# Altium PCB PCB_Gloves.pcbdoc
Units mil, origin at the board's own origin, x right, y up, seen from the top; angles counter-clockwise.
Board outline 3915 x 3980 mil, 2 copper layers (Top Layer, Bottom Layer); 46 components, 79 nets, 199 pads, 40 vias.
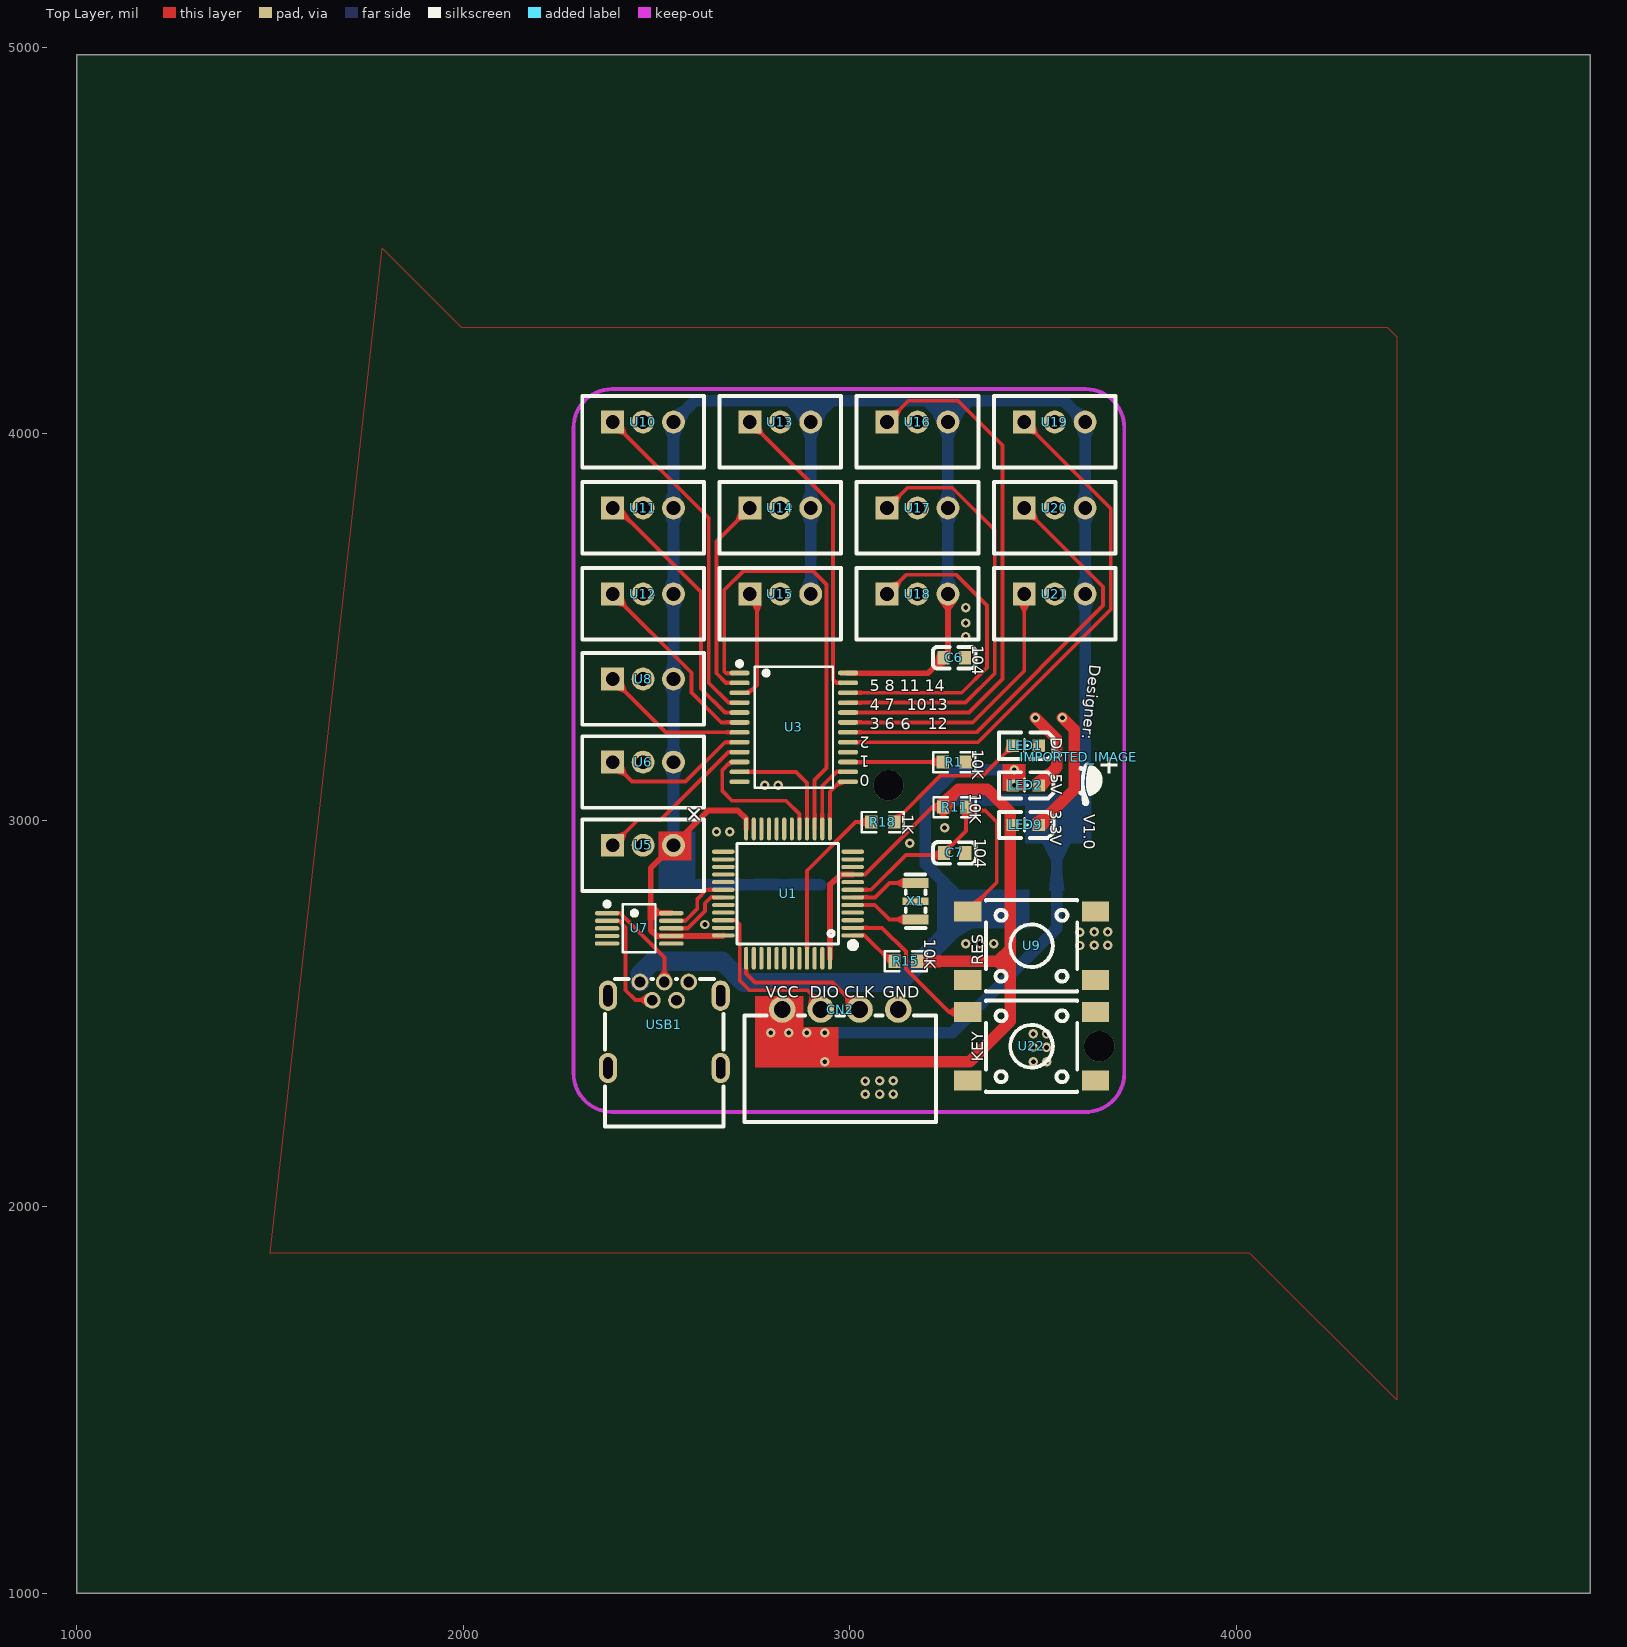
[diagram p0: Top Layer view]
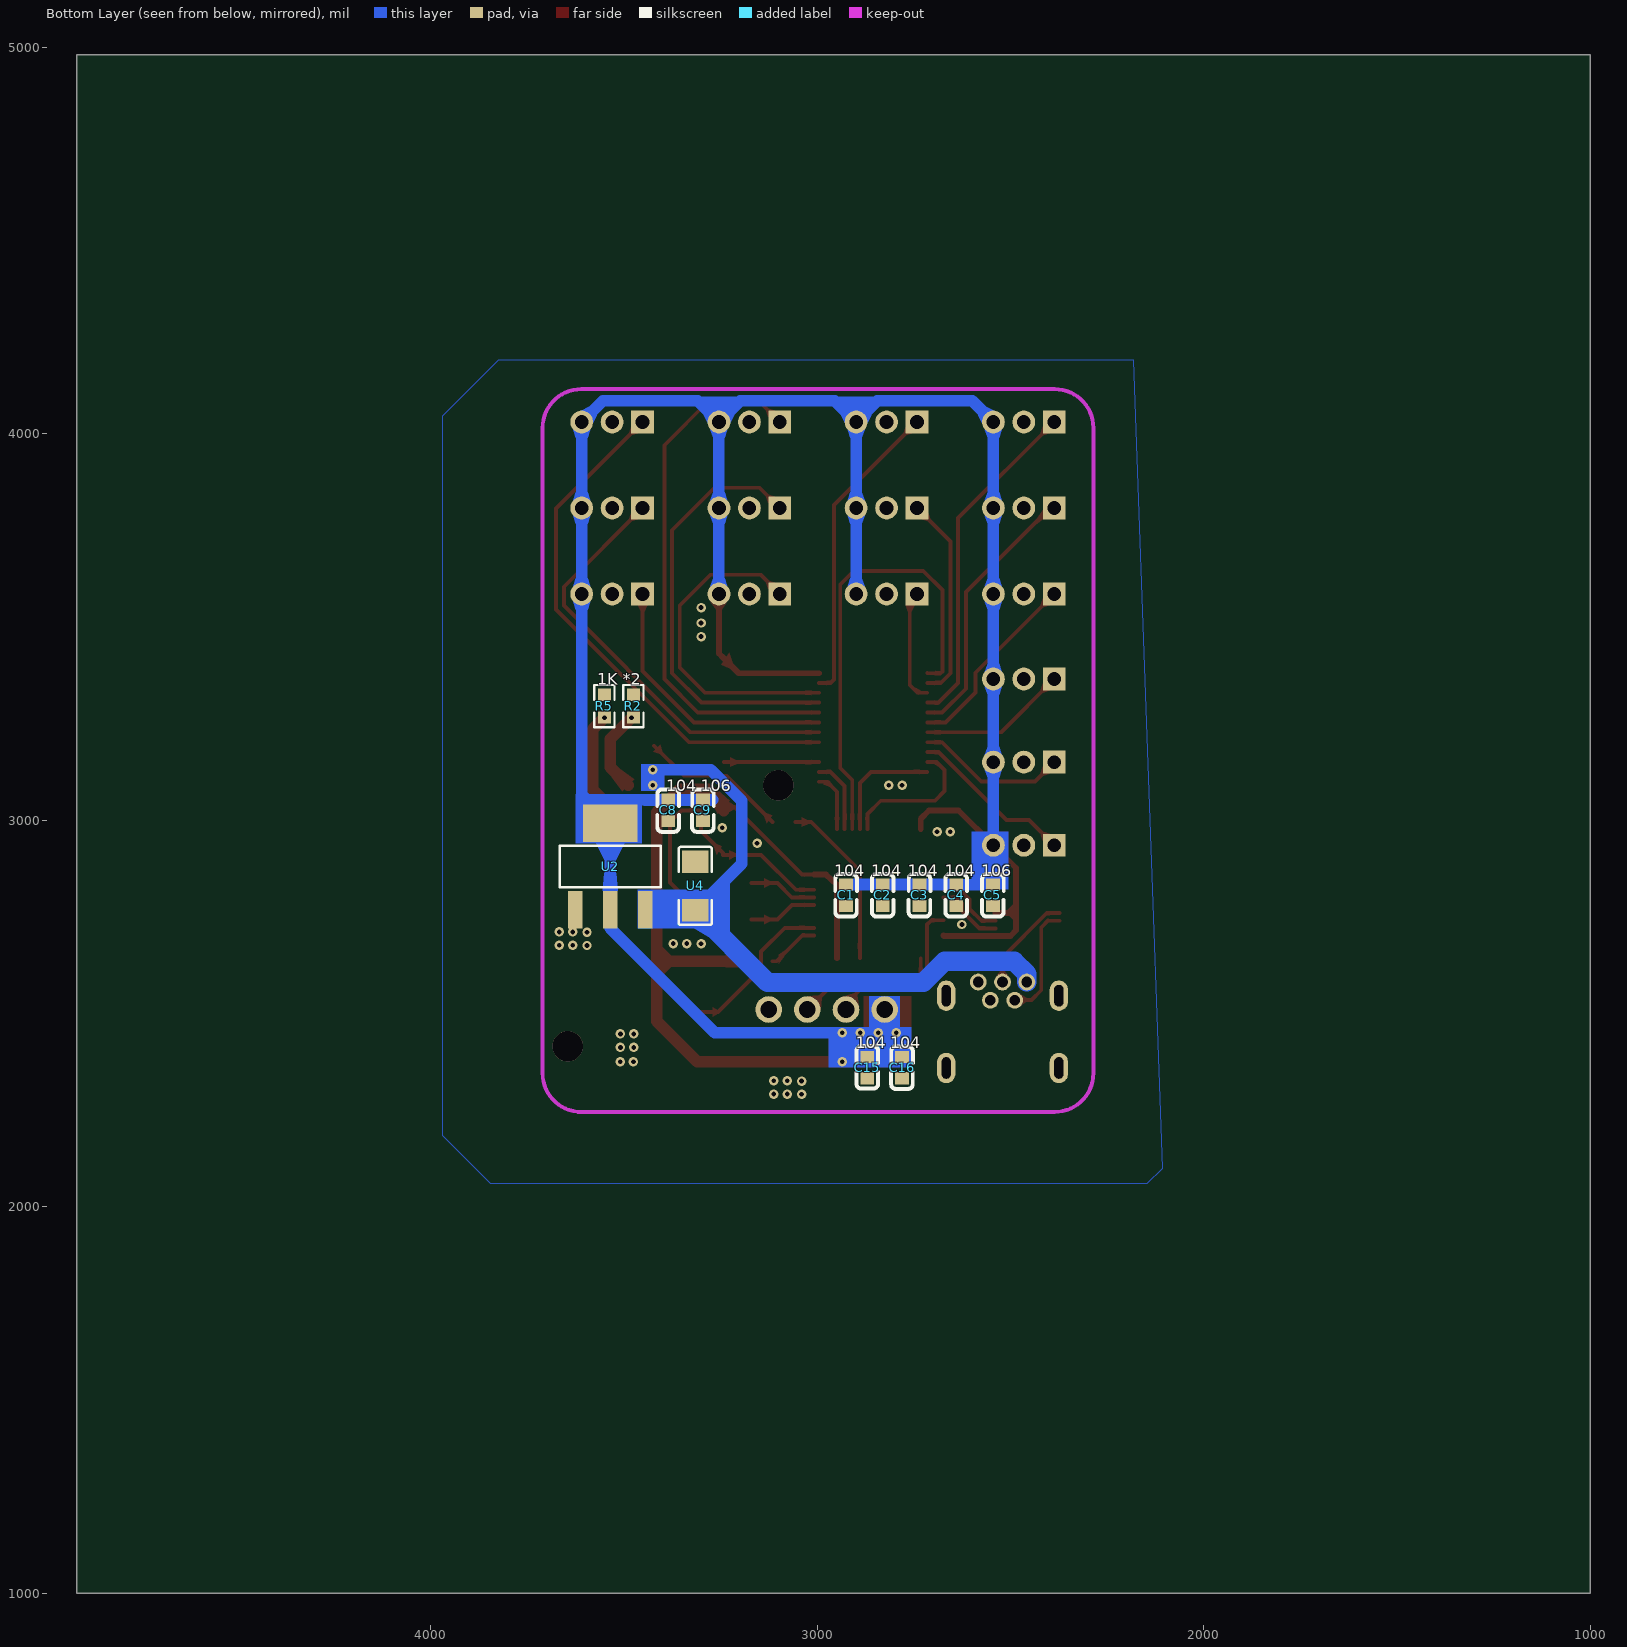
[diagram p1: Bottom Layer view, seen from below]

## Layer stack, top to bottom
Top Layer: signal copper (thickness not stored)
Dielectric: dielectric 12.6, FR-4, Dk 4.8
Bottom Layer: signal copper (thickness not stored)

## Board outline
4915,1000 1000,1000 1000,4980 4915,4980

## Components (designator, comment, footprint, x,y, rotation, side; value= is the part's Value field where it differs from the comment)
C1 "104" C0603#1 2924.79,2805.61 r270 bottom
C2 "104" C0603#1 2829.79,2805.61 r270 bottom
C3 "104" C0603#1 2734.79,2805.61 r270 bottom
C4 "104" C0603#1 2639.79,2805.61 r270 bottom
C5 "106" C0603#1 2544.79,2805.61 r270 bottom
C6 "104" C0603#2 3270,3420 r0 top
C7 "104" C0603#2 3270.81,2915 r0 top
C8 "104" C0603#1 3385,3025 r270 bottom
C9 "106" C0603#1 3295,3025 r270 bottom
C15 "104" C0603#1 2870,2360 r90 bottom
C16 "104" C0603#1 2780,2360 r270 bottom
CN2 "XH-4AW_C2908613" CONN-TH_XH-4AW 2975,2510 r0 top
IMPORTED_IMAGE "IMPORTED_IMAGE" IMPORTED_IMAGE 3591.73,3162.85 r0 top
LED1 "LED0603-R" LED0603-R-RD 3455,3192.5 r180 top
LED2 "LED0603-R" LED0603-R-RD 3455,3090 r180 top
LED9 "LED0603-R" LED0603-R-RD 3455,2987.5 r180 top
R1 "10k" R0603#1 3270,3150 r0 top
R2 "1k" R0603#2 3475,3295 r270 bottom
R5 "1k" R0603#2 3550,3295 r270 bottom
R11 "10k" R0603#1 3270.81,3033.58 r0 top
R15 "10k" R0603#1 3145,2635 r0 top
R18 "1k" R0603#1 3085,2995 r0 top
U1 "STM32F103C8T6" LQFP-48_L7.0-W7.0-P0.50-LS9.0-BL 2840,2810 r90 top
U2 "AMS1117-3.3V" SOT-223-4_L6.5-W3.5-P2.30-LS7.0-BR 3535,2880 r90 bottom
U3 "CD74HC4067SM96" SSOP-24_L8.1-W5.3-P0.65-LS7.8-BL 2855,3240 r270 top
U4 "47UF/10V" C1206 3315,2830 r270 bottom
U5 "WAFER-PH2.0-3PZZ-R62" CONN-TH_4P-P2.00_WAFER-PH2.0-3PZZ-R62 2465,2935 r0 top
U6 "WAFER-PH2.0-3PZZ-R62" CONN-TH_4P-P2.00_WAFER-PH2.0-3PZZ-R62 2465,3150 r0 top
U7 "CH340E" MSOP-10_L3.0-W3.0-P0.50-LS5.0-BL 2455,2720 r270 top
U8 "WAFER-PH2.0-3PZZ-R62" CONN-TH_4P-P2.00_WAFER-PH2.0-3PZZ-R62 2465,3365 r0 top
U9 "TPS645-5NC60" SW-SMD_4P-L6.0-W6.0-P4.50-LS9.2 3470,2675 r180 top
U10 "WAFER-PH2.0-3PZZ-R62" CONN-TH_4P-P2.00_WAFER-PH2.0-3PZZ-R62 2465,4030 r0 top
U11 "WAFER-PH2.0-3PZZ-R62" CONN-TH_4P-P2.00_WAFER-PH2.0-3PZZ-R62 2465,3807.5 r0 top
U12 "WAFER-PH2.0-3PZZ-R62" CONN-TH_4P-P2.00_WAFER-PH2.0-3PZZ-R62 2465,3585 r0 top
U13 "WAFER-PH2.0-3PZZ-R62" CONN-TH_4P-P2.00_WAFER-PH2.0-3PZZ-R62 2820,4030 r0 top
U14 "WAFER-PH2.0-3PZZ-R62" CONN-TH_4P-P2.00_WAFER-PH2.0-3PZZ-R62 2820,3807.5 r0 top
U15 "WAFER-PH2.0-3PZZ-R62" CONN-TH_4P-P2.00_WAFER-PH2.0-3PZZ-R62 2820,3585 r0 top
U16 "WAFER-PH2.0-3PZZ-R62" CONN-TH_4P-P2.00_WAFER-PH2.0-3PZZ-R62 3175,4030 r0 top
U17 "WAFER-PH2.0-3PZZ-R62" CONN-TH_4P-P2.00_WAFER-PH2.0-3PZZ-R62 3175,3807.5 r0 top
U18 "WAFER-PH2.0-3PZZ-R62" CONN-TH_4P-P2.00_WAFER-PH2.0-3PZZ-R62 3175,3585 r0 top
U19 "WAFER-PH2.0-3PZZ-R62" CONN-TH_4P-P2.00_WAFER-PH2.0-3PZZ-R62 3530,4030 r0 top
U20 "WAFER-PH2.0-3PZZ-R62" CONN-TH_4P-P2.00_WAFER-PH2.0-3PZZ-R62 3530,3807.5 r0 top
U21 "WAFER-PH2.0-3PZZ-R62" CONN-TH_4P-P2.00_WAFER-PH2.0-3PZZ-R62 3530,3585 r0 top
U22 "TPS645-5NC60" SW-SMD_4P-L6.0-W6.0-P4.50-LS9.2 3470,2415 r180 top
USB1 "UX-150-ARG4" MICRO-USB-TH_UX-150-ARG4 2520,2470 r0 top
X1 "8MHz" OSC-SMD_3P-L3.2-W1.3-P1.2-L 3170,2790 r90 top

## Footprints (in the part's own frame and the unit in brackets; to place one, negate y for a bottom-side part, rotate by r counter-clockwise, add the part's x,y. Pads: shape width x height; smd on the part's side, far side on the other; paste and mask are expansions set on the pad)
C0603#1 [mm]
  rect 0.8x0.9 smd paste+0 mask+0.051: 1(0.7,0) 2(-0.7,0)
  silkscreen extent -1.39,-0.72 1.41,0.71
C0603#2 [mm]
  rect 0.8x0.9 smd paste+0 mask+0.051: 1(-0.7,0) 2(0.7,0)
  silkscreen extent -1.41,-0.71 1.39,0.72
C1206 [mm]
  rect 1.485x1.728 smd paste-100 mask+0.051: 1(1.593,0) 2(-1.593,0)
  silkscreen extent -2.56,-1.09 2.56,1.09
CONN-TH_4P-P2.00_WAFER-PH2.0-3PZZ-R62 [mm]
  rect 1.5x1.5 hole 0.9 paste+0 mask+0.05: 1(-2,0)
  round 1.5 hole 0.9 paste+0 mask+0.05: 2(0,0) 3(2,0)
  silkscreen extent -4,-3 4,1.7
CONN-TH_XH-4AW [mm]
  round 1.75 hole 1.1 paste+0 mask+0.05: 1(-3.81,0) 2(-1.27,0) 3(1.27,0) 4(3.81,0)
  silkscreen extent -6.3,-7.4 6.3,-0.4
IMPORTED_IMAGE [mil]
  silkscreen extent 0,-126 100,0
LED0603-R-RD [mm]
  rect 0.8x0.8 smd paste+0 mask+0.051: 1(0.851,0) 2(-0.851,0)
  silkscreen extent -1.82,-0.86 1.77,0.86
LQFP-48_L7.0-W7.0-P0.50-LS9.0-BL [mm]
  oval 0.27x1.5 smd paste+0 mask+0.05: 1(-2.75,-4.25) 2(-2.25,-4.25) 3(-1.75,-4.25) 4(-1.25,-4.25) 5(-0.75,-4.25) 6(-0.25,-4.25) 7(0.25,-4.25) 8(0.75,-4.25) 9(1.25,-4.25) 10(1.75,-4.25) 11(2.25,-4.25) 12(2.75,-4.25) 25(2.75,4.25) 26(2.25,4.25) 27(1.75,4.25) 28(1.25,4.25) 29(0.75,4.25) 30(0.25,4.25) 31(-0.25,4.25) 32(-0.75,4.25) 33(-1.25,4.25) 34(-1.75,4.25) 35(-2.25,4.25) 36(-2.75,4.25)
  oval 1.5x0.27 smd paste+0 mask+0.05: 13(4.25,-2.75) 14(4.25,-2.25) 15(4.25,-1.75) 16(4.25,-1.25) 17(4.25,-0.75) 18(4.25,-0.25) 19(4.25,0.25) 20(4.25,0.75) 21(4.25,1.25) 22(4.25,1.75) 23(4.25,2.25) 24(4.25,2.75) 37(-4.25,2.75) 38(-4.25,2.25) 39(-4.25,1.75) 40(-4.25,1.25) 41(-4.25,0.75) 42(-4.25,0.25) 43(-4.25,-0.25) 44(-4.25,-0.75) 45(-4.25,-1.25) 46(-4.25,-1.75) 47(-4.25,-2.25) 48(-4.25,-2.75)
  silkscreen extent -3.59,-4.46 3.3,3.34
MICRO-USB-TH_UX-150-ARG4 [mm]
  round 1.1 hole 0.7 paste+0 mask+0.051: 1(-1.6,2.825) 2(-0.8,1.625) 3(0,2.825) 4(0.8,1.625) 5(1.6,2.825)
  oval 1.2x2 hole 0.6 slot 1.4 at 90 deg paste+0 mask+0.051: 6(-3.7,-2.825) 6(-3.7,1.925) 6(3.7,-2.825) 6(3.7,1.925)
  silkscreen extent -3.9,-6.67 3.9,3.03
MSOP-10_L3.0-W3.0-P0.50-LS5.0-BL [mm]
  oval 0.28x1.62 smd paste+0 mask+0.051: 1(-1,-2.11) 2(-0.5,-2.11) 3(0,-2.11) 4(0.5,-2.11) 5(1,-2.11) 6(1,2.11) 7(0.5,2.11) 8(0,2.11) 9(-0.5,2.11) 10(-1,2.11)
  silkscreen extent -1.74,-2.26 1.58,1.07
OSC-SMD_3P-L3.2-W1.3-P1.2-L [mm]
  rect 0.65x1.7 smd paste+0 mask+0.051: 1(-1.2,0) 3(1.2,0)
  rect 0.5x1.7 smd paste+0 mask+0.051: 2(0,0)
  silkscreen extent -1.75,-0.66 1.75,0.66
R0603#1 [mil]
  rect 31.75x34.02 smd paste-3937.01 mask+2: 1(-29.66,0) 2(29.66,0)
  silkscreen extent -55,-26 55,26
R0603#2 [mil]
  rect 31.75x34.02 smd paste-3937.01 mask+2: 1(29.66,0) 2(-29.66,0)
  silkscreen extent -55,-26 55,26
SOT-223-4_L6.5-W3.5-P2.30-LS7.0-BR [mm]
  rect 2.47x0.98 smd paste+0 mask+0.051: 1(-2.835,2.3) 2(-2.835,0) 3(-2.835,-2.3)
  rect 2.47x3.6 smd paste+0 mask+0.051: 4(2.835,0)
  silkscreen extent -1.37,-3.33 1.37,3.33
SSOP-24_L8.1-W5.3-P0.65-LS7.8-BL [mm]
  oval 0.308x1.324 smd paste+0 mask+0.051: 1(-3.575,-3.562) 2(-2.925,-3.562) 3(-2.275,-3.562) 4(-1.625,-3.562) 5(-0.975,-3.562) 6(-0.325,-3.562) 7(0.325,-3.562) 8(0.975,-3.562) 9(1.625,-3.562) 10(2.275,-3.562) 11(2.925,-3.562) 12(3.575,-3.562) 13(3.575,3.562) 14(2.925,3.562) 15(2.275,3.562) 16(1.625,3.562) 17(0.975,3.562) 18(0.325,3.562) 19(-0.325,3.562) 20(-0.975,3.562) 21(-1.625,3.562) 22(-2.275,3.562) 23(-2.925,3.562) 24(-3.575,3.562)
  silkscreen extent -4.33,-3.71 3.98,2.57
SW-SMD_4P-L6.0-W6.0-P4.50-LS9.2 [mm]
  rect 1.8x1.3 smd paste+0 mask+0.051: 1(-4.2,2.25) 2(4.2,2.25) 3(-4.2,-2.25) 4(4.2,-2.25)
  silkscreen extent -3,-3 3,3

## Free pads (board coordinates)
  round 78.74 hole 78.74 unplated paste+0: ""(3100,3090) ""(3645,2415)

## Via types
v1: diameter 24.41, hole 12.2, Top Layer to Bottom Layer, tented both sides, 40 vias

## Nets (pads, with @x,y where several pads share a name; then routed paths per layer and width w, separated by ;. In a path a pad name is that pad's centre, name@x,y a point inside that pad or via, vN(x,y) a via of type N, cw(c..) or ccw(c..) an arc to the next point about the centre after c; other vN are vias at no path point)
ADC1_IN5: U1.15 U3.1 | length 1197.7
  Top Layer w10: U3.1 2680,3380 2675,3385 2675,3595 2725,3645 2905,3645 2940,3610 2940,3135 2908.9,3103.9 U1.15
C0: U3.9 U5.1 | length 428.3
  Top Layer w10: U5.1 2451.3,3000 2510,3000 2686,3176 U3.9
C1: U3.8 U6.1 | length 391.3
  Top Layer w10: U6.1 2436.3,3100 2575,3100 2676.6,3201.6 U3.8
C2: U3.7 U8.1 | length 385.6
  Top Layer w10: U8.1 2524.1,3227.2 U3.7
C3: U3.6 U12.1 | length 496.1
  Top Layer w10: U12.1 2590,3381.2 2590,3330 2667.2,3252.8 U3.6
C4: U3.5 U11.1 | length 694.1
  Top Layer w10: U11.1 2397.5,3807.5 2615,3590 2615,3340 2676.6,3278.4 U3.5
C5: U3.4 U10.1 | length 878.9
  Top Layer w10: U10.1 2635,3781.2 2635,3355 2686,3304 U3.4
C6: U3.3 U15.1 | length 296.4
  Top Layer w10: U3.3 2739.6,3329.6 2760,3350 2760,3566.2 U15.1
C7: U3.2 U14.1 | length 533.4
  Top Layer w10: U3.2 2680,3355 2655,3380 2655,3721.2 U14.1
C8: U3.23 U13.1 | length 797.9
  Top Layer w10: U13.1 2956.1,3815.2 2956.1,3363.9 2965,3355 U3.23
C9: U3.22 U18.1 | length 859.4
  Top Layer w10: U3.22 3289.6,3329.6 3355,3395 3355,3555 3275,3635 3146.3,3635 U18.1
C10: U3.21 U17.1 | length 1127.3
  Top Layer w10: U3.21 3299,3304 3375,3380 3375,3750 3265,3860 3148.8,3860 U17.1
C11: U3.20 U16.1 | length 1409.8
  Top Layer w10: U3.20 3308.4,3278.4 3395,3365 3395,3970 3280,4085 3151.3,4085 U16.1
C12: U3.19 U21.1 | length 710.1
  Top Layer w10: U3.19 3317.8,3252.8 3451.3,3386.3 U21.1
C13: U3.18 U20.1 | length 1132.4
  Top Layer w10: U3.18 3327.2,3227.2 3655,3555 3655,3603.7 U20.1
C14: U3.17 U19.1 | length 1399.7
  Top Layer w10: U3.17 3331.6,3201.6 3675,3545 3675,3806.2 U19.1
CH340_D+: U7.1 USB1.3 | length 259.3
  Top Layer w10: U7.1 2405.6,2759.4 2520,2645 USB1.3
CH340_D-: U7.2 USB1.2 | length 297
  Top Layer w10: U7.2 2402.3,2740 2420,2722.3 2420,2560 2445,2535 2487.5,2535 USB1.2
GND: C1.1 C2.1 C3.1 C4.1 C5.1 C6.2 C7.2 C8.1 C9.1 C15.2 C16.1 CN2.4 LED1.2 R1.2 R2.2 R5.2 U1.8 U1.23 U1.35 U1.44 U1.47 U2.1 U3.12 U4.2 U5.2 U6.2 U7.3 U8.2 U9.2 U10.2 U11.2 U12.2 U13.2 U14.2 U15.2 U16.2 U17.2 U18.2 U19.2 U20.2 U21.2 U22.2 USB1.5 X1.2
  other v1: 3040,2290.68 3076.91,2291.35 3111.91,2291.35 3040,2325 3076.91,2325.68 3111.91,2325.68 3475,2375 3509.32,2375 3474.32,2411.91 3508.65,2411.91 3474.32,2446.91 3508.65,2446.91 3595,2675.68 3631.91,2676.35 3666.91,2676.35 3300,2680 3336.91,2680.68 3371.91,2680.68 3595,2710 3631.91,2710.68 3666.91,2710.68 2625,2730 3155,2940 2655,2970 2689.32,2970 3245,2980 2780,3090 2814.32,3090 3300,3475 3300,3510 3300,3550
KEY1: U1.2 U22.4 | length 413.9
  Top Layer w10: U1.2 3083.6,2721.4 3145,2660 3145,2615 3256.4,2503.6 U22.4@3304.6,2503.6
LED0: R18.1 U1.45 | length 444.7
  Top Layer w10: U1.45 2889.2,2869.2 3015,2995 R18.1
LED1_1: LED1.1 R18.2 | length 388.6
  Top Layer w10: R18.2 3234.7,3115 3344,3115 LED1.1
LED9_2: LED9.2 R5.1 | length 327.8
  Top Layer w30: LED9.2 3580,3079 3580,3235 v1(3550,3265)
NRST: C7.1 R11.2 U1.7 U9.4 | length 766.7
  Top Layer w10: U1.7 3054.8,2819.8 3145,2910 3243.3,2910 C7.1 ; C7.1@3243.2,2915 3300.5,2972.2 3300.5,3025 3350.3,3024.9 3380,2995 3380,2838.9 U9.4@3304.6,2763.6
OSC_IN: U1.5 X1.1 | length 178.3
  Top Layer w10: U1.5 3064.5,2780.5 3102.2,2742.8 X1.1
OSC_OUT: U1.6 X1.3 | length 178
  Top Layer w10: U1.6 3065.2,2800.2 3102.2,2837.2 X1.3
R2_1: LED2.2 R2.1 | length 217
  Top Layer w30: v1(3480,3265) 3535,3210 3535,3136.5 LED2.2
S0: U1.17 U3.10 | length 370.6
  Top Layer w10: U3.10 2690.4,3150.4 2670,3130 2670,3075 2695,3050 2835,3050 2869.5,3015.5 U1.17
S1: U1.16 U3.11 | length 304.9
  Top Layer w10: U3.11 2860.2,3124.8 2889.2,3095.8 U1.16
S2: U1.14 U3.14 | length 192.9
  Top Layer w10: U1.14 2928.6,3088.7 2965,3124.9 U3.14
S3: U1.13 U3.13 | length 153.7
  Top Layer w10: U1.13 2948.3,3073.3 2974.2,3099.3 U3.13
S$9725: 
S$9742: 
S$9749: 
S$9789: 
S$9796: 
S$9803: 
S$9810: 
SWDCLK: CN2.3 U1.37 | length 371.3
  Top Layer w10: U1.37 2731.7,2603.3 2755,2580 2955,2580 CN2.3
SWDIO: CN2.2 U1.34 | length 441.8
  Top Layer w10: U1.34 2703.9,2741.1 2715,2730 2715,2585 2740,2560 2890,2560 2925,2525 CN2.2
U1_1: R15.1 U1.1 | length 135.6
  Top Layer w10: U1.1 3038.3,2701.7 3105,2635 R15.1
U1_3: U1.3
U1_4: U1.4
U1_10: U1.10
U1_11: U1.11
U1_12: U1.12
U1_18: U1.18
U1_19: U1.19
U1_20: U1.20
U1_21: U1.21
U1_22: U1.22
U1_25: U1.25
U1_26: U1.26
U1_27: U1.27
U1_28: U1.28
U1_29: U1.29
U1_32: U1.32
U1_33: U1.33
U1_38: U1.38
U1_39: U1.39
U1_40: U1.40
U1_41: U1.41
U1_42: U1.42
U1_43: U1.43
U1_46: U1.46
U3_15: R1.1 U3.15 | length 245.2
  Top Layer w10: U3.15 2995.7,3150 R1.1
U3_16: U3.16
U7_4: U7.4
U7_5: U7.5
U7_6: U7.6
U9_1: U9.1
U9_3: U9.3
U22_1: U22.1
U22_3: U22.3
USART1_RX: U1.31 U7.8 | length 179.5
  Top Layer w10: U7.8 2580,2720 2625,2765 2625,2785 2640.2,2800.2 U1.31
USART1_TX: U1.30 U7.9 | length 182.4
  Top Layer w10: U7.9 2574.7,2739.7 2605,2770 2605,2795 2629.8,2819.8 U1.30
USB1_4: USB1.4
VCC3.3V: C1.2 C2.2 C3.2 C4.2 C5.2 C6.1 C8.2 C9.2 C15.1 C16.2 CN2.1 LED9.1 R11.1 R15.2 U1.9 U1.24 U1.36 U1.48 U2.2 U2.4 U3.24 U5.3 U6.3 U7.7 U7.10 U8.3 U10.3 U11.3 U12.3 U13.3 U14.3 U15.3 U16.3 U17.3 U18.3 U19.3 U20.3 U21.3 | length 9564.5
  Top Layer w10: U1.9 3039.2,2859.2 3213.6,3033.6 R11.1@3241.1,3033.6
  Top Layer w15: U7.10 2505.6,2759.4 ; U1.36 2671.3,2700.3 U7.7 2499.7,2700.3 2485,2715 2485,2745 2499.4,2759.4 2505.6,2759.4 ; U1.24 2731.7,3003.3 2710,3025 2633.7,3025 U5.3 2485,2876.3 2485,2780 2505.6,2759.4 ; U1.48 2948.3,2833.3 2976.4,2859.2 U1.9 ; U3.24@2995.2,3380 3202.4,3380 C6.1 3253.7,3431.3 U18.3
  Top Layer w30: 2905,2375 3310,2375 3415,2480 ; R15.2 3410.5,2635 3415,2639.5 ; R11.1@3241.2,3025 3241.2,3041.1 3280,3080 3355,3080 3415,3020 3415,2480 ; 3415,2605 3415,2480
  Bottom Layer w30: U5.3 2544.8,2933.9 C5.2 C4.2 C3.2 C2.2 C1.2 ; U10.3 2598.7,4085 2843.7,4085 U13.3 2953.7,4085 3198.7,4085 U16.3 3308.7,4085 3553.7,4085 U19.3 ; U5.3 U6.3 U8.3 U12.3 U10.3 ; 2825,2450 3265,2450 3535,2720 U2.2 U2.4 ; U15.3 U13.3 ; U18.3 U16.3 ; 3270,3052.6 C8.2 3474,3052.6 U2.4 ; U21.3 3608.7,3065.3 U2.4 ; U21.3 U19.3
  other v1: 2935,2375 2795,2450 2841.67,2450 2888.33,2450 2935,2450
VCC5V: LED2.1 U2.3 U4.1 USB1.1 | length 1718.2
  Bottom Layer w30: v1(3425,3130) 3275,3130 3195,3050 3195,2887.3 U4.1 3316.1,2768.4 U2.3
  Bottom Layer w50: USB1.1 2457,2602 2490,2635 2670,2635 2725,2580 3127.7,2580 U4.1
  other v1: 3425,3090
pads on no net: USB1.6

## Polygon pours and split planes (outlines as drawn)
GND on Bottom Layer (solid): 2180,4190 3825,4190 3970,4045 3970,2185 3845,2060 2145,2060 2105,2100
GND on Top Layer (solid): 1790,4480 1995,4275 4390,4275 4415,4250 4415,1500 4035,1880 1500,1880

## Keep-outs
Keep-Out Layer:
  lines w10 net S$9725: 2285,2345 ccw(c2385,2345) 2385,2245 ; 2285,4015 cw(c2385,4015) 2385,4115 ; 3610,2245 ccw(c3610,2345) 3710,2345 ; 3610,4115 cw(c3610,4015) 3710,4015
  lines w10 net S$9810: 2430,2245 cw(c2430.36,2245) 2430.36,2245.36

## Other copper
Top Layer:
  region net VCC3.3V: 3417.5,2580.25 3362.5,2634.75 3417.5,2689.75 3417.5,2580.25
  region net VCC3.3V: 2477.44,2781.57 2477.44,2741.38 2499.48,2763.42 2501.7,2763.42
  region net SWDIO: 2934.88,2543 2891.02,2515.67 2895.84,2547.09 2904.55,2552.52
  region net SWDCLK: 2990.62,2507.84 3027.16,2544.38 2995.37,2546.7 2988.3,2539.63
  region net VCC3.3V: 2514.27,2936.84 2545.58,2905.53 2520.61,2901.27 2510.01,2911.87
  region net VCC3.3V: 2541.87,2964.46 2573.21,2933.17 2577.45,2958.14 2566.83,2968.74
  region net VCC3.3V: 3275.88,3565.46 3231.59,3565.46 3246.24,3544.8 3261.24,3544.8
  region net CH340_D-: 2474.75,2550.71 2473.62,2518.24 2458.87,2530 2459.21,2540
  region net CH340_D+: 2536.24,2595.54 2503.76,2595.54 2515,2610.7 2525,2610.7
  region net LED1_1: 3115.87,3012.01 3130.53,2991.76 3136.22,3009.49 3130.28,3017.69
  region net LED0: 3039.47,3007.5 3039.47,2982.5 3024.47,2990 3024.47,3000
  region net VCC3.3V: 3247.92,3402.28 3226.69,3433.2 3217.98,3406.14 3226.61,3393.57
  region net LED1_1: 3423.43,3176.75 3405.75,3194.43 3400.45,3178.52 3407.52,3171.45
  region net R2_1: 3472.75,3105.75 3504.25,3074.25 3530.93,3111.21 3509.71,3132.43
  region net LED9_2: 3472.75,3003.25 3504.25,2971.75 3530.93,3008.71 3509.71,3029.93
  region net U3_15: 3224.47,3162.5 3224.47,3137.5 3209.47,3145 3209.47,3155
  region net NRST: 3312.96,3016.57 3287.96,3016.57 3295.46,3001.57 3305.46,3001.57
  region net NRST: 3316.34,3037.47 3316.34,3016.57 3331.34,3019.94 3331.34,3029.94
  region net VCC3.3V: 3225.27,3050.59 3257.03,3016.57 3279.57,3058.36 3259.09,3080.3
  region net VCC3.3V: 3225.27,3046.08 3225.27,3021.08 3213.58,3028.58 3213.58,3038.58
  region net VCC3.3V: 3190.5,2652 3190.5,2618 3235.5,2620 3235.5,2650
  region net U1_1: 3099.5,2652 3099.5,2628 3084.5,2648.43 3084.5,2662.57
  region net C0: 2398.11,2964.53 2415.79,2946.85 2421.09,2962.76 2414.02,2969.83
  region net C1: 2415.79,3138.13 2398.09,3120.47 2414.01,3115.17 2421.09,3122.23
  region net C2: 2415.79,3353.13 2398.09,3335.47 2414.01,3330.17 2421.09,3337.23
  region net C5: 2415.79,4018.13 2398.09,4000.47 2414.01,3995.17 2421.09,4002.23
  region net C4: 2415.79,3801.71 2415.79,3777.97 2430.79,3767.14 2430.79,3781.28
  region net C3: 2415.79,3573.13 2398.09,3555.47 2414.01,3550.17 2421.09,3557.23
  region net C8: 2770.79,4018.13 2753.09,4000.47 2769.01,3995.17 2776.09,4002.23
  region net C7: 2729.41,3777.97 2711.73,3795.66 2706.43,3779.74 2713.5,3772.67
  region net C6: 2770.79,3555.47 2747.5,3555.47 2755,3540.47 2765,3540.47
  region net C11: 3108.11,4059.53 3125.79,4041.85 3131.09,4057.76 3124.02,4064.83
  region net C10: 3108.11,3837.03 3125.79,3819.35 3131.09,3835.26 3124.02,3842.33
  region net C9: 3108.11,3614.53 3125.79,3596.85 3131.09,3612.76 3124.02,3619.83
  region net C14: 3480.79,4018.13 3463.09,4000.47 3479.01,3995.17 3486.09,4002.23
  region net C13: 3480.79,3795.63 3463.09,3777.97 3479.01,3772.67 3486.09,3779.73
  region net C12: 3463.75,3555.47 3438.75,3555.47 3446.25,3540.47 3456.25,3540.47
  region net NRST: 3317.77,2789.2 3340.1,2789.2 3352.34,2804.2 3338.2,2804.2
  region net KEY1: 3269.2,2491.08 3269.2,2516.08 3256.42,2508.58 3256.42,2498.58
  region net OSC_IN: 3136.53,2730.26 3136.53,2755.26 3121.53,2747.76 3121.53,2737.76
  region net OSC_OUT: 3136.53,2824.74 3136.53,2849.74 3121.53,2842.24 3121.53,2832.24
  region net NRST: 3227.5,2897.5 3227.5,2922.5 3212.5,2915 3212.5,2905
  region net NRST: 3246.71,2932.72 3258.99,2910.94 3265.41,2930.09 3260.31,2939.14
  region net U1_1: 3031.53,2696.42 3031.53,2707.05 3038.27,2706.73 3038.27,2696.73
  region net KEY1: 3031.53,2716.11 3031.53,2726.74 3046.53,2726.42 3046.53,2716.42
  region net OSC_IN: 3031.53,2775.16 3031.53,2785.79 3046.53,2785.47 3046.53,2775.47
  region net OSC_OUT: 3031.53,2794.85 3031.53,2805.48 3046.53,2805.16 3046.53,2795.16
  region net NRST: 3031.55,2825.15 3031.52,2814.52 3046.52,2814.8 3046.55,2824.8
  region net VCC3.3V: 3031.53,2853.89 3031.53,2864.52 3039.21,2864.21 3039.21,2854.21
  region net S3: 2953.59,3001.52 2942.96,3001.54 2943.3,3016.54 2953.3,3016.52
  region net S2: 2933.89,3001.53 2923.26,3001.54 2923.6,3016.54 2933.6,3016.53
  region net ADC1_IN5: 2914.22,3001.53 2903.59,3001.53 2903.9,3016.53 2913.9,3016.53
  region net S1: 2894.52,3001.53 2883.89,3001.53 2884.21,3016.53 2894.21,3016.53
  region net S0: 2874.85,3001.53 2864.22,3001.53 2864.53,3015.47 2874.53,3015.47
  region net USART1_TX: 2648.47,2814.52 2648.47,2825.15 2633.47,2824.84 2633.47,2814.84
  region net USART1_RX: 2648.49,2805.48 2648.44,2794.85 2640.18,2795.2 2640.22,2805.2
  region net SWDIO: 2696.89,2735.79 2696.89,2746.42 2703.9,2746.1 2703.9,2736.1
  region net SWDCLK: 2737.04,2618.47 2726.41,2618.47 2726.73,2603.47 2736.73,2603.47
  region net LED0: 2894.52,2666.9 2883.89,2666.89 2884.2,2681.89 2894.2,2681.9
  region net ADC1_IN5: 2695.07,3374.69 2694.45,3386.8 2679.75,3385 2680.25,3375
  region net C7: 2694.83,3349.1 2694.69,3361.22 2679.95,3360 2680.05,3350
  region net C6: 2737.96,3324.42 2731.56,3334.72 2744.78,3341.85 2750.21,3333.14
  region net C5: 2694.76,3297.92 2694.76,3310.04 2686.02,3308.98 2686.02,3298.98
  region net C4: 2694.76,3272.33 2694.76,3284.45 2679.76,3283.39 2679.76,3273.39
  region net C3: 2694.76,3246.73 2694.76,3258.85 2679.76,3257.79 2679.76,3247.79
  region net C2: 2694.76,3221.14 2694.76,3233.26 2679.76,3232.2 2679.76,3222.2
  region net C1: 2694.76,3195.55 2694.76,3207.67 2679.76,3206.61 2679.76,3196.61
  region net C0: 2694.76,3169.96 2694.76,3182.08 2686.02,3181.02 2686.02,3171.02
  region net S0: 2698.08,3145.36 2691.44,3155.5 2679.41,3146.48 2685.01,3137.94
  region net S1: 2734.76,3118.78 2734.76,3130.9 2749.76,3129.84 2749.76,3119.84
  region net C8: 2975.33,3349.1 2975.14,3361.22 2964.92,3360 2965.08,3350
  region net C9: 3015.24,3323.51 3015.24,3335.63 3030.24,3334.57 3030.24,3324.57
  region net C10: 3015.24,3297.92 3015.24,3310.04 3030.24,3308.98 3030.24,3298.98
  region net C11: 3015.24,3272.33 3015.24,3284.45 3030.24,3283.39 3030.24,3273.39
  region net C12: 3015.24,3246.73 3015.24,3258.85 3030.24,3257.79 3030.24,3247.79
  region net C13: 3015.24,3221.14 3015.24,3233.26 3030.24,3232.2 3030.24,3222.2
  region net C14: 3015.24,3195.55 3015.24,3207.67 3030.24,3206.61 3030.24,3196.61
  region net U3_15: 3015.41,3156.49 3015.07,3144.37 3030.09,3145 3030.38,3155
  region net S2: 2975.28,3130.9 2975.2,3118.78 2964.97,3119.9 2965.03,3129.9
  region net S3: 2983.98,3093.19 2970.26,3102.71 2960.72,3092.85 2968.49,3086.48
  region net CH340_D+: 2398.33,2753.86 2398.28,2764.88 2405.58,2764.4 2405.62,2754.4
  region net USART1_TX: 2564.45,2734.17 2564.45,2745.19 2574.68,2744.68 2574.68,2734.68
  region net USART1_RX: 2564.45,2714.49 2564.45,2725.51 2579.45,2725 2579.45,2715
  rectangle net VCC3.3V: 2755,2362.5 2880,2545
  rectangle net VCC3.3V: 2755,2360 2970,2465
  rectangle net VCC5V: 3395,3075 3455,3145
  rectangle net VCC3.3V: 2505,2895 2590,2970
Bottom Layer:
  region net VCC3.3V: 2833.73,4095 2963.7,4095 2963.7,4094.96 2898.74,4029.99
  region net VCC3.3V: 3188.7,4095 3318.7,4095 3318.7,4094.96 3253.74,4029.99
  region net VCC5V: 3315,2767.3 3226.35,2678.65 3226.35,2855.95 3315,2767.3
  region net VCC3.3V: 2565.88,3169.53 2521.59,3169.53 2528.74,3190.2 2558.74,3190.2
  region net VCC3.3V: 2565.88,3130.46 2521.59,3130.46 2528.74,3109.8 2558.74,3109.8
  region net VCC3.3V: 2565.88,3384.53 2521.59,3384.53 2528.74,3405.2 2558.74,3405.2
  region net VCC3.3V: 2565.88,3345.46 2521.59,3345.46 2528.74,3324.8 2558.74,3324.8
  region net VCC3.3V: 2541.89,4059.46 2573.2,4028.15 2582.77,4047.81 2561.55,4069.03
  region net VCC3.3V: 2565.88,4010.46 2521.59,4010.46 2528.74,3989.8 2558.74,3989.8
  region net VCC3.3V: 2565.88,3827.03 2521.59,3827.03 2528.74,3847.7 2558.74,3847.7
  region net VCC3.3V: 2565.88,3787.96 2521.59,3787.96 2528.74,3767.3 2558.74,3767.3
  region net VCC3.3V: 2565.88,3604.53 2521.59,3604.53 2528.74,3625.2 2558.74,3625.2
  region net VCC3.3V: 2565.88,3565.46 2521.59,3565.46 2528.74,3544.8 2558.74,3544.8
  region net VCC3.3V: 2896.89,4059.46 2928.2,4028.15 2937.77,4047.81 2916.55,4069.03
  region net VCC3.3V: 2869.27,4028.15 2900.58,4059.46 2880.92,4069.03 2859.7,4047.81
  region net VCC3.3V: 2920.88,4010.46 2876.59,4010.46 2883.74,3989.8 2913.74,3989.8
  region net VCC3.3V: 2920.88,3787.96 2876.59,3787.96 2883.74,3767.3 2913.74,3767.3
  region net VCC3.3V: 2920.88,3827.03 2876.59,3827.03 2883.74,3847.7 2913.74,3847.7
  region net VCC3.3V: 2920.88,3604.53 2876.59,3604.53 2883.74,3625.2 2913.74,3625.2
  region net VCC3.3V: 3251.89,4059.46 3283.2,4028.15 3292.77,4047.81 3271.55,4069.03
  region net VCC3.3V: 3224.27,4028.15 3255.58,4059.46 3235.92,4069.03 3214.7,4047.81
  region net VCC3.3V: 3275.88,4010.46 3231.59,4010.46 3238.74,3989.8 3268.74,3989.8
  region net VCC3.3V: 3275.88,3787.96 3231.59,3787.96 3238.74,3767.3 3268.74,3767.3
  region net VCC3.3V: 3275.88,3827.03 3231.59,3827.03 3238.74,3847.7 3268.74,3847.7
  region net VCC3.3V: 3275.88,3604.53 3231.59,3604.53 3238.74,3625.2 3268.74,3625.2
  region net VCC3.3V: 3579.27,4028.15 3610.58,4059.46 3590.92,4069.03 3569.7,4047.81
  region net VCC3.3V: 3630.88,4010.46 3586.59,4010.46 3593.74,3989.8 3623.74,3989.8
  region net VCC3.3V: 3630.88,3787.96 3586.59,3787.96 3593.74,3767.3 3623.74,3767.3
  region net VCC3.3V: 3630.88,3827.03 3586.59,3827.03 3593.74,3847.7 3623.74,3847.7
  region net VCC3.3V: 3630.86,3565.45 3586.57,3565.48 3593.7,3544.81 3623.7,3544.78
  region net VCC3.3V: 3630.88,3604.53 3586.59,3604.53 3593.74,3625.2 3623.74,3625.2
  region net VCC3.3V: 3402.7,3036.8 3402.7,3068.3 3447.7,3067.56 3447.7,3037.56
  region net VCC3.3V: 3367.3,3068.3 3367.3,3036.8 3322.3,3037.56 3322.3,3067.56
  region net VCC3.3V: 3277.3,3068.3 3277.3,3036.8 3270,3037.56 3270,3067.56
  region net VCC3.3V: 3312.7,3036.8 3312.7,3068.3 3357.7,3067.56 3357.7,3037.56
  region net VCC3.3V: 3515.71,2817.01 3554.29,2817.01 3550,2862.01 3520,2862.01
  region net VCC5V: 3425.16,2730.89 3425.16,2805.89 3380.16,2783.39 3380.16,2753.39
  region net VCC3.3V: 3605.86,3040.24 3546.14,3040.24 3587.49,3065.3 3619.31,3054.69
  region net VCC3.3V: 3523.87,3040.24 3464.14,3040.24 3463.44,3041.95 3495.26,3052.56
  region net VCC3.3V: 3497.5,2942.99 3572.5,2942.99 3550,2897.99 3520,2897.99
  region net VCC5V: 3349.01,2738.07 3280.99,2796.54 3242.8,2730.46 3280.83,2697.78
  region net VCC5V: 3349.01,2796.54 3349.01,2738.07 3394.01,2753.39 3394.01,2783.39
  region net VCC3.3V: 2907.07,2848.92 2907.07,2817.42 2862.07,2818.17 2862.07,2848.17
  region net VCC3.3V: 2847.5,2817.42 2847.5,2848.92 2892.5,2848.17 2892.5,2818.17
  region net VCC3.3V: 2812.07,2848.92 2812.07,2817.42 2767.07,2818.17 2767.07,2848.17
  region net VCC3.3V: 2752.5,2817.42 2752.5,2848.92 2797.5,2848.17 2797.5,2818.17
  region net VCC3.3V: 2717.07,2848.92 2717.07,2817.42 2672.07,2818.17 2672.07,2848.17
  region net VCC3.3V: 2657.5,2817.42 2657.5,2848.92 2702.5,2848.17 2702.5,2818.17
  rectangle net VCC5V: 3280,2720 3465,2820
  rectangle net VCC3.3V: 3452.5,2940 3625,3067.5
  rectangle net VCC3.3V: 2755,2360 2970,2465
  rectangle net VCC3.3V: 2785,2430 2865,2545
  rectangle net VCC5V: 3395,3075 3455,3145
  rectangle net VCC3.3V: 2505,2820 2600,2970

## Silkscreen, mask and mechanical layers (free items; w line width, h text height)
Top Overlay:
  text "104" at 3317,3453 h30 r270
  text "Designer:" at 3610,3405 h50 r264
  text "5 8 11 14" at 3052,3333 h30
  text "4 7" at 3052,3283.86 h30
  text "10" at 3147,3283.88 h30
  text "13" at 3202,3283.88 h30
  text "9" at 3155.69,3264.68 h30 r185
  text "3 6" at 3052,3234.74 h30
  text "12" at 3202,3234.74 h30
  text "2" at 3052,3215.6 h30 r180
  text "D0" at 3520,3215 h30 r270
  text "10K" at 3317,3183 h30 r270
  text "1" at 3052,3166.46 h30 r180
  text "5V" at 3520,3120 h30 r270
  text "0" at 3052,3117.32 h30 r180
  text "10K" at 3309.81,3069.58 h30 r270
  text "3.3V" at 3518.5,3027.5 h30 r270
  text "1K" at 3135,3015 h30 r270
  text "V1.0" at 3595,3015 h50 r270
  text "+" at 2632.68,3009.38 h50 r135
  text "104" at 3322.81,2953 h30 r270
  text "10K" at 3192,2693 h30 r270
  text "RES" at 3345,2625 h30 r90
  text "VCC" at 2781.88,2540.01 h30
  text "DIO" at 2896.21,2540 h30
  text "CLK" at 2985,2540 h30
  text "GND" at 3085,2540.01 h30
  text "KEY" at 3345,2375 h30 r90
Bottom Overlay:
  text "1K *2" at 3568.98,3350.34 h30
  text "106" at 3300.21,3074.39 h30
  text "104" at 3390.21,3074.39 h30
  text "106" at 2575,2855 h30
  text "104" at 2670,2855 h30
  text "104" at 2765,2855 h30
  text "104" at 2860,2855 h30
  text "104" at 2955,2855 h30
  text "104" at 2810.21,2409.39 h30
  text "104" at 2900.21,2409.39 h30